# Altium PCB IO_PCB.PcbDoc
Units mm, origin at the board's own origin, x right, y up, seen from the top; angles counter-clockwise.
Board outline 52.58 x 21.21 mm, 2 copper layers (Top Layer, Bottom Layer); 30 components, 24 nets, 111 pads, 88 vias.
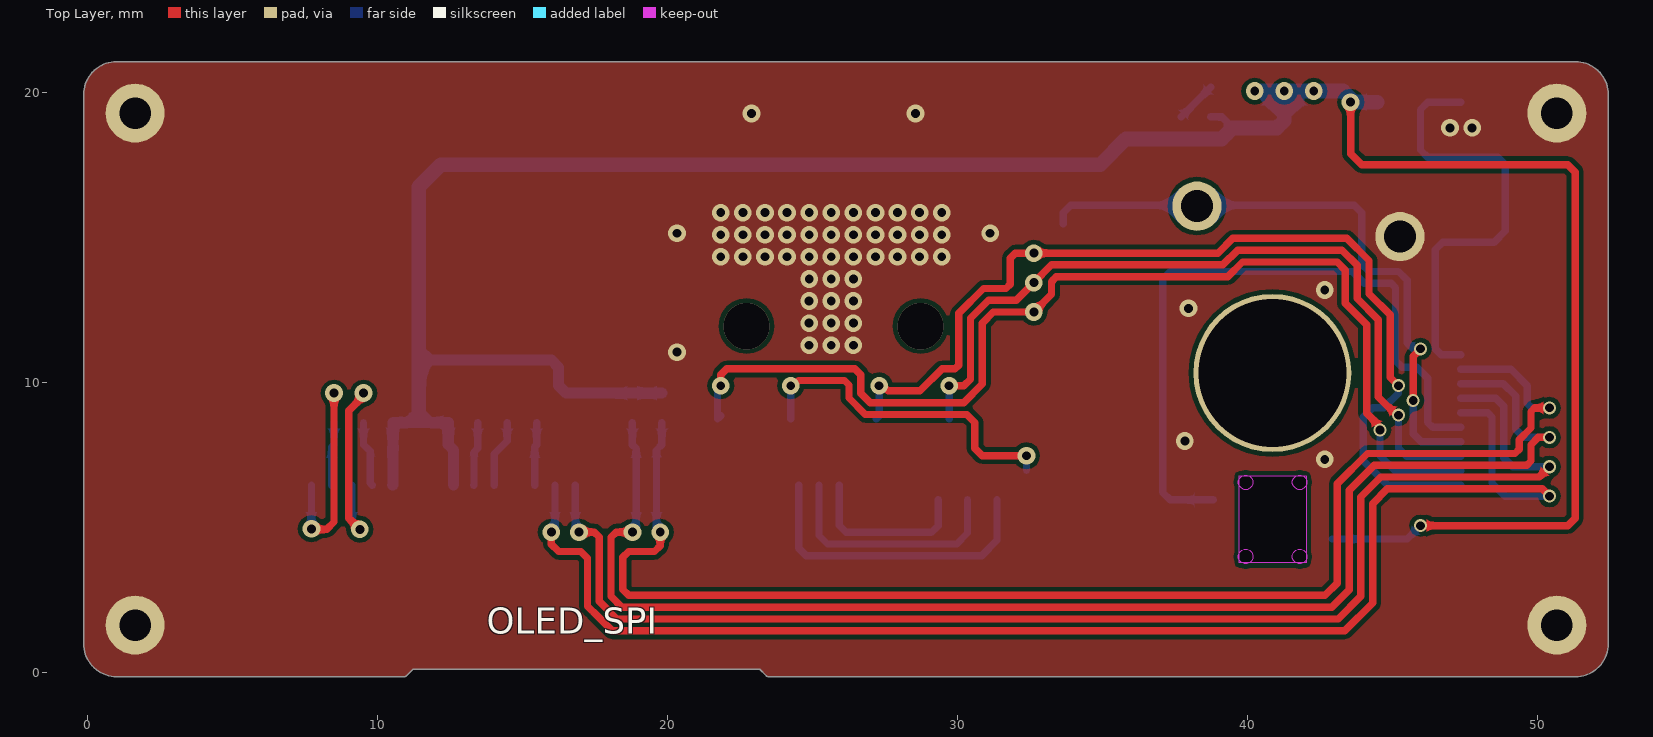
[diagram p0: Top Layer view]
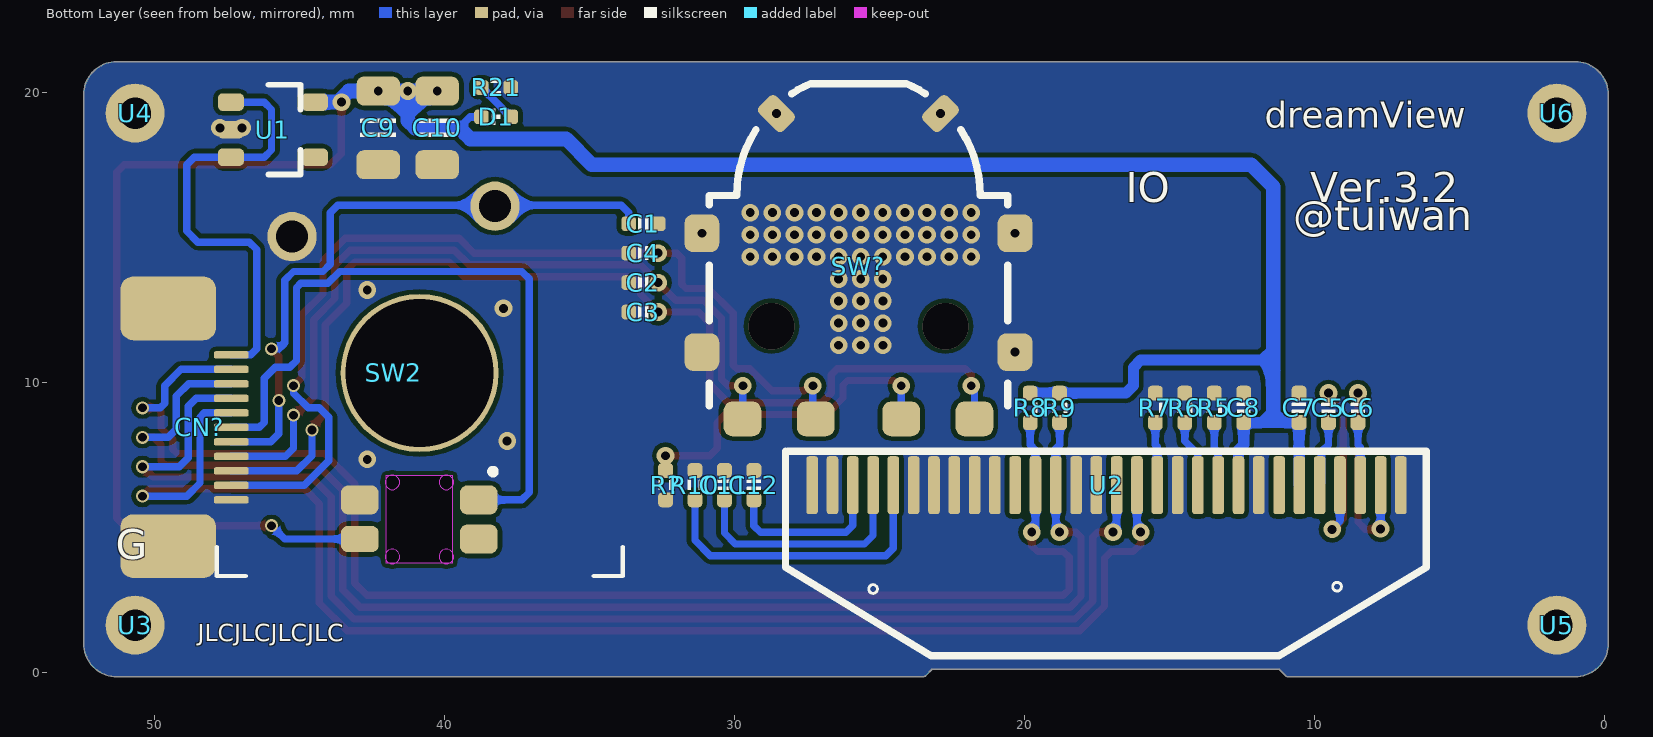
[diagram p1: Bottom Layer view, seen from below]
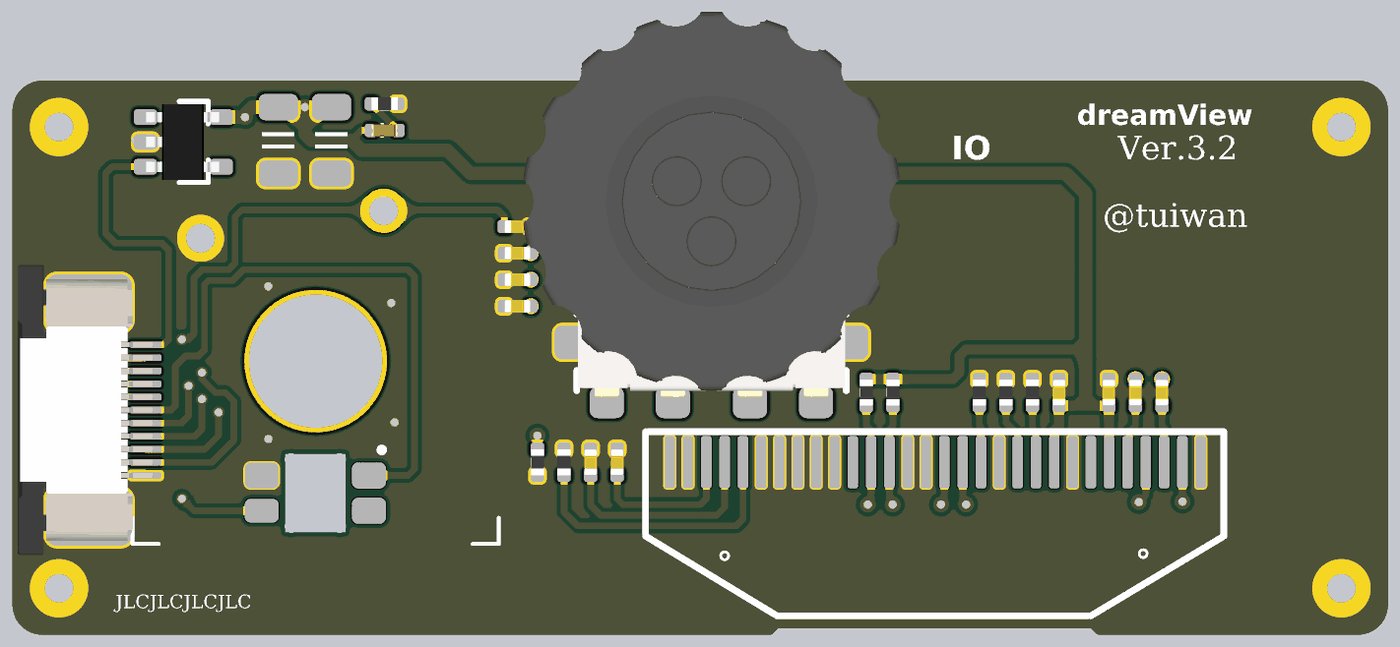
[diagram p2: 3D render of the assembled board from below, using the file's embedded part models]

## Layer stack, top to bottom
Top Solder: solder mask 0.0102, Solder Resist, Dk 3.5
Top Layer: signal copper 0.0356
Dielectric 1: dielectric 0.32, FR-4, Dk 4.8
Bottom Layer: signal copper 0.0356
Bottom Solder: solder mask 0.0102, Solder Resist, Dk 3.5

## Board outline
1.016,-0.127 10.922,-0.127 ccw(c10.922,0) 11.013,-0.09 11.012,-0.09 11.229,0.127 23.188,0.127 23.405,-0.09 23.404,-0.09 ccw(c23.495,0) 23.495,-0.127 30.226,-0.127 51.308,-0.127 ccw(c51.308,1.016) 52.451,1.016 52.451,19.939 ccw(c51.308,19.939) 51.308,21.082 1.016,21.082 ccw(c1.016,19.939) -0.127,19.939 -0.127,1.016 ccw(c1.016,1.016)

## Design rules (kind name [scope] priority, off if disabled: settings)
Clearance Clearance_1 [All] p1: gap=0.152 ignorepadtopadclearanceinfootprint=FALSE except(0: Arc-Hole Track-Hole SMDPad-Hole THPad-Hole Via-Hole Fill-Hole Poly-Hole Region-Hole Text-Hole)
Clearance [All] p2: gap=0.254 ignorepadtopadclearanceinfootprint=FALSE except(0: Arc-Hole Track-Hole SMDPad-Hole THPad-Hole Via-Hole Fill-Hole Poly-Hole Region-Hole Text-Hole)
ComponentClearance [All] p1: gap=0 collisioncheckmode=3 verticalgap=0 showdistances=FALSE
Length [InNetClass('spi')] p1: maxlimit=30.48 minlimit=29.718 usedelayunits=FALSE
MatchedLengths [InNetClass('spi')] p1: tolerance=25.4 checknetsindiffpair=FALSE checkdiffpairvsdiffpair=TRUE checkxsignals=TRUE checkothers=TRUE usedelayunits=FALSE
PlaneConnect [All] p1: planeconnectstyle=Direct reliefexpansion=0.508 reliefentries=4 reliefconductorwidth=0.254 reliefairgap=0.254
PolygonConnect [All] p1: connectstyle=Direct reliefconductorwidth=0.254 reliefentries=4 polygonreliefangle="90 Angle" airgapwidth=0.254
RoutingVias [All] p1: holewidth=0.711 width=1.27 viastyle="Through Hole" minholewidth=0.711 minwidth=1.27 maxholewidth=0.711 maxwidth=1.27
SolderMaskExpansion [All] p1: expansion=0.102
UnRoutedNet [All] p1: checkbadconnections=TRUE
Width [All] p1: maxlimit=2.032 minlimit=0.254 preferedwidth=0.254 minimp=50.000000 maximp=50.000000 favimp=50.000000
27 further rules are at their usual default settings.

## Components (designator, comment, footprint, x,y, rotation, side; value= is the part's Value field where it differs from the comment)
C1 "0.1uF" CAP_0402 33.147,15.494 r180 bottom
C2 "0.1uF" CAP_0402 33.147,13.462 r180 bottom
C3 "0.1uF" CAP_0402 33.147,12.446 r180 bottom
C4 "0.1uF" CAP_0402 33.147,14.478 r180 bottom
C5 "1uF" CAP_0402 9.525,9.144 r270 bottom
C6 "1uF" CAP_0402 8.509,9.144 r270 bottom
C7 "1uF" CAP_0402 10.541,9.144 r90 bottom
C8 "1uF" CAP_0402 12.446,9.144 r90 bottom
C9 "10uF" CAP_1206 42.291,18.796 r90 bottom
C10 "0.1uF" CAP_1206 40.259,18.796 r90 bottom
C11 "4.7uF" CAP_0402 30.353,6.477 r270 bottom
C12 "2.2uF" CAP_0402 29.337,6.477 r270 bottom
CN? "X1002WRS-11B1-9TSN" FPC-SMD_P0.50-11P_LCS-SJ-H2.0 48.446,8.473 r90 bottom
D1 "color?" LED_0402 38.227,19.177 r180 bottom
R5 "4.7K" RES_0402 13.462,9.144 r270 bottom value=22R
R6 "4.7K" RES_0402 14.478,9.144 r270 bottom value=22R
R7 "4.7K" RES_0402 15.494,9.144 r270 bottom value=22R
R8 "4.7K" RES_0402 19.812,9.144 r90 bottom value=22R
R9 "4.7K" RES_0402 18.796,9.144 r90 bottom value=22R
R10 "10K" RES_0402 31.369,6.477 r90 bottom value=22R
R21 "1K" RES_0402 38.227,20.193 r180 bottom value=22R
R? "10K" RES_0402 32.385,6.477 r270 bottom value=22R
SW2 "佳达隆带灯热插拔矮轴" Gateron_Switch_Direct 40.863,10.346 r0 top
SW? "MITSUMI拨轮编码器" SIQ_02FVS3 25.732,16.463 r180 bottom
U1 "SPX3819M5-L-3-3" SOT23_5 45.871,18.735 r180 bottom
U2 "SSD1306/15" OLED_0.96_30P 28.287,7.804 r180 bottom
U3 "螺柱孔" M1 50.673,1.651 r180 bottom
U4 "螺柱孔" M1 50.673,19.304 r180 bottom
U5 "螺柱孔" M1 1.651,1.651 r180 bottom
U6 "螺柱孔" M1 1.651,19.304 r180 bottom

## Footprints (in the part's own frame and the unit in brackets; to place one, negate y for a bottom-side part, rotate by r counter-clockwise, add the part's x,y. Pads: shape width x height; smd on the part's side, far side on the other; paste and mask are expansions set on the pad)
CAP_0402 [mil] "CAP_0402"
  rrect50% 20x20 smd: 1(-20,0) 2(20,0)
  silkscreen extent -6,-9 7,9, body extent -20,-10 20,10, height 20
CAP_1206 [mm] "CAP_1206"
  rrect50% 1x1.5 smd: 1(-1.27,0) 2(1.27,0)
  silkscreen extent -0.3,-0.61 0.3,0.61, body extent -1.5,-0.75 1.5,0.75, height 1.5
FPC-SMD_P0.50-11P_LCS-SJ-H2.0 [mm]
  rrect50% 0.25x1.2 smd: 1(2.498,-1.084) 2(1.998,-1.084) 3(1.498,-1.084) 4(0.998,-1.084) 5(0.498,-1.084) 6(-0.002,-1.084) 7(-0.502,-1.084) 8(-1.002,-1.084) 9(-1.502,-1.084) 10(-2.002,-1.084) 11(-2.502,-1.084)
  rrect40% 2.2x3.3 smd: 12(4.1,1.084) 13(-4.1,1.084)
  body extent -5.55,-1.39 5.55,3.81, height 2
Gateron_Switch_Direct [mm] "佳达隆焊接带灯矮轴"
  round 1.699 hole 1.1 mask+0.051: 1(-2.6,5.752) 2(4.4,4.702)
  round 5.45 hole 5.1 mask+0.102: NC(0,0)
  rrect50% 1.3x0.9 smd far side mask+0.051: RGB0(2.063,-5.727)
  rrect50% 1.3x1 smd far side mask+0.051: RGB1(-2.037,-5.727) RGB2(2.063,-4.377) RGB3(-2.037,-4.377)
  Keep-Out Layer board cut-out: 1.163,-6.552 -1.137,-6.552 -1.137,-3.552 1.163,-3.552 1.163,-6.552
  Keep-Out Layer board cut-out: -0.667,-3.772 -0.667,-3.822 -0.705,-3.914 -0.776,-3.984 -0.867,-4.022 -0.967,-4.022 -1.059,-3.984 -1.129,-3.914 -1.167,-3.822 -1.167,-3.772 -1.167,-3.722 -1.129,-3.631 -1.059,-3.56 -0.967,-3.522 -0.867,-3.522 -0.776,-3.56 -0.705,-3.631 -0.667,-3.722 -0.667,-3.772 -0.667,-3.772
  Keep-Out Layer board cut-out: 1.193,-3.772 1.193,-3.822 1.155,-3.914 1.084,-3.984 0.992,-4.022 0.893,-4.022 0.801,-3.984 0.731,-3.914 0.693,-3.822 0.693,-3.772 0.693,-3.722 0.731,-3.631 0.801,-3.56 0.893,-3.522 0.992,-3.522 1.084,-3.56 1.155,-3.631 1.193,-3.722 1.193,-3.772 1.193,-3.772
  Keep-Out Layer board cut-out: 1.193,-6.332 1.193,-6.382 1.155,-6.474 1.084,-6.544 0.992,-6.582 0.893,-6.582 0.801,-6.544 0.731,-6.474 0.693,-6.382 0.693,-6.332 0.693,-6.282 0.731,-6.19 0.801,-6.12 0.893,-6.082 0.992,-6.082 1.084,-6.12 1.155,-6.19 1.193,-6.282 1.193,-6.332 1.193,-6.332
  Keep-Out Layer board cut-out: -0.667,-6.332 -0.667,-6.382 -0.705,-6.474 -0.776,-6.544 -0.867,-6.582 -0.967,-6.582 -1.059,-6.544 -1.129,-6.474 -1.167,-6.382 -1.167,-6.332 -1.167,-6.282 -1.129,-6.19 -1.059,-6.12 -0.967,-6.082 -0.867,-6.082 -0.776,-6.12 -0.705,-6.19 -0.667,-6.282 -0.667,-6.332 -0.667,-6.332
LED_0402 [mil] "LED_0402"
  rrect50% 20x20 smd: 1(-20,0) 2(20,0)
  silkscreen extent -6,-10 6,10, body extent -20,-10 20,10, height 18
M1 [mil] "M1螺孔"
  round 80 hole 43 mask+4: 1(0,0)
OLED_0.96_30P [mm]
  rrect50% 0.4x2 smd mask+0.051: 1(21.258,-1.327) 2(20.558,-1.327) 3(19.858,-1.327) 4(19.158,-1.327) 5(18.458,-1.327) 6(17.758,-1.327) 7(17.058,-1.327) 8(16.358,-1.327) 9(15.658,-1.327) 10(14.958,-1.327) 11(14.258,-1.327) 12(13.558,-1.327) 13(12.858,-1.327) 14(12.158,-1.327) 15(11.458,-1.327) 16(10.758,-1.327) 17(10.058,-1.327) 18(9.358,-1.327) 19(8.658,-1.327) 20(7.958,-1.327) 21(7.258,-1.327) 22(6.558,-1.327) 23(5.858,-1.327) 24(5.158,-1.327) 25(4.458,-1.327) 26(3.758,-1.327) 27(3.058,-1.327) 28(2.358,-1.327) 29(1.658,-1.327) 30(0.958,-1.327)
  silkscreen extent 0.04,-7.21 22.14,-0.16
RES_0402 [mil] "RES_0402"
  rrect50% 20x20 smd: 1(-20,0) 2(20,0)
  silkscreen extent -6,-10 7,10, body extent -20,-10 20,10, height 14
SIQ_02FVS3 [mm] "美上美滚动编码器"
  rrect50% 1.3x1.2 smd: 1(-4,-7.7) 2(-1.475,-7.7) 3(1.475,-7.7) 4(4,-7.7)
  rrect50% 1.2x1.3 smd: 5(-5.4,-5.4) 5(-5.4,-1.3) 5(5.4,-5.4) 5(5.4,-1.3)
  rrect50% 0.85x1.2 smd rot 45: 5(-2.828,2.828)
  rrect50% 0.85x1.2 smd rot 135: 5(2.828,2.828)
  silkscreen extent -5.15,-7.25 5.15,3.86, body extent -7.2,-7.5 7.2,7.25, height 4.06
SOT23_5 [mm] "SOT23_5"
  rrect50% 0.889x0.6 smd: 1(-1.5,0.95) 2(-1.5,0) 3(-1.5,-0.95) 4(1.396,-0.95) 5(1.396,0.95)
  silkscreen extent -0.2,-1.55 0.9,1.55, body extent -1.48,-1.45 1.32,1.45, height 1.2

## Part data
C1 C2 C3 C4 C5 C6 C7 C8 C9 C10 C11 C12: library part Capacitor_MLCC, "Capacitor_MLCC"
CN?: library part 11P端子, Current Rating (Max)=1A, JLCPCB Part Class=扩展, LCSC Part Name="1mm 1x11P 卧贴 带", Manufacturer="XKB Connectivity(中国星", Operating Temperature Range=-25¡æ~+85¡, Welding Temperature (Max)=260℃, Add into BOM=yes, Contact Material=»ÆÍ, Contact Plating=锡, Convert to PCB=yes, Datasheet=https://atta.szlcsc.com/upload/public/pdf/source/20211011/1437E7AC5BA28D97E3BC6E2D0E99510D.pdf, Device=X1002WRS-11B1-9TSN, Gender=¹«ÐÍ², Manufacturer Part=X1002WRS-11B1-9TSN, Mounting Style=ÎÔÌ, Name=X1002WRS-11B1-9TSN, Number of PINs Per Row=11, Number of Rows=1, Pins Structure=1x11P, Pitch=1mm, Reference Series=-, Row Spacing=-, Supplier=LCSC, Supplier Footprint=SMD,P=1mm, Supplier Part=C528067, Symbol=X1002WRS-11B1-9TSN
D1: library part LED, "LED"
R5 R6 R7 R8 R9 R10 R21 R?: library part Resistor_SMD, "Resistor_SMD"
SW2: library part Gateron_Switch_Low, Add into BOM=yes, Convert to PCB=yes, Device=带灯热插, Symbol=带灯热插
SW?: library part MITSUMI_Encoder, "MITSUMI美上美拨轮编码器", BOM_JLCPCB Part Class="Extended Part", BOM_Manufacturer=ALPSALPINE, BOM_Manufacturer Part=EC11E1534443, BOM_Supplier=LCSC, BOM_Supplier Part=C1322543, Contributor=LCSC, spicePre=S, spiceSymbolName=EC11E1534443
U1: library part LP2992, "LP2992_LDO"
U2: library part SSD1306-12864, Add into BOM=yes, Convert to PCB=yes, Device=SSD1306/15, Symbol=SSD1306/15
U3 U4 U5 U6: library part Hole, _=3, Add into BOM=yes, Convert to PCB=yes, Device=M2螺柱, Symbol=M2螺柱

## Via types
v1: diameter 0.61, hole 0.305, Top Layer to Bottom Layer, tented both sides, 76 vias
v2: diameter 0.45, hole 0.3, Top Layer to Bottom Layer, tented both sides, 10 vias
v3: diameter 1.6, hole 1.6, Top Layer to Bottom Layer, 2 vias

## Nets (pads, with @x,y where several pads share a name; then routed paths per layer and width w, separated by ;. In a path a pad name is that pad's centre, name@x,y a point inside that pad or via, vN(x,y) a via of type N, cw(c..) or ccw(c..) an arc to the next point about the centre after c; other vN are vias at no path point)
3V3: C7.1 C8.1 C9.2 C10.2 D1.1 R8.2 R9.2 SW2.RGB0 U1.5 U2.6 U2.9 | length 97.1
  Top Layer w0.254: v1(43.561,19.685) 43.561,17.907 43.942,17.526 51.054,17.526 51.308,17.272 51.308,5.334 51.054,5.08 v2(45.974,5.08)
  Bottom Layer w0.254: 11.43,10.795 11.811,10.795 ; D1.1 39.116,19.177 39.306,18.986 ; 39.306,18.605 39.306,18.986 ; 39.497,18.796 39.306,18.986 ; SW2.RGB0 45.513,4.619 v2(45.974,5.08)
  Bottom Layer w0.381: U2.6 10.541,6.489 C7.1 11.049,8.636 ; 11.43,10.414 11.811,10.795 ; 11.43,11.176 11.811,10.795 ; U2.9 12.629,7.691 12.446,7.874 C8.1 11.811,8.636 ; R8.2 R9.2 16.51,9.652 16.256,9.906 16.256,10.541 16.002,10.795 11.811,10.795 ; 11.049,8.636 11.811,8.636 ; 11.049,8.636 11.239,8.826 ; 11.239,8.826 11.43,9.017 11.62,8.826 ; 11.239,8.826 11.62,8.826 ; 11.62,8.826 11.811,8.636
  Bottom Layer w0.508: 11.43,9.017 11.43,10.414 11.43,10.795 11.43,11.176 11.43,16.764 12.192,17.526 34.925,17.526 35.814,18.415 38.735,18.415 39.116,18.415 39.306,18.605 39.497,18.796 41.021,18.796 41.275,19.05 41.275,19.368 ; v1(40.259,20.066) C10.2@40.509,20.066 ; U1.5 43.688,19.685 43.307,20.066 v1(42.291,20.066) v1@41.529,20.066 ; C10.2@40.509,20.066 C10.2@40.894,20.066 ; C10.2@40.509,20.066 C10.2@40.782,19.793 ; C10.2@40.782,19.793 41.207,19.368 41.275,19.368 ; C10.2@40.782,19.793 v1@41.167,19.793 ; C10.2@40.894,20.066 v1@41.167,19.793 ; C10.2@40.894,20.066 v1(41.275,20.066) ; v1@41.167,19.793 41.275,19.685 ; 41.275,19.368 41.342,19.368 41.711,19.736 41.711,19.783 41.701,19.793 v1@41.383,19.793 ; 41.275,19.368 41.275,19.685 ; 41.275,19.685 v1@41.383,19.793 ; 41.275,19.685 v1(41.275,20.066) ; v1(41.275,20.066) v1@41.529,20.066 ; v1@41.383,19.793 41.529,19.939 v1@41.529,20.066
CS: R7.2 U2.13 | length 2.2
  Bottom Layer w0.254: U2.13 15.429,7.809 15.494,7.874 R7.2
D0: CN?.3 R9.1 U2.18 | length 48.5
  Top Layer w0.254: v1(18.802,4.858) 18.24,4.858 18.059,4.677 18.059,2.642 18.432,2.269 42.909,2.269 43.51,2.87 43.51,6.299 44.374,7.163 49.635,7.163 49.784,7.312 49.784,7.874 50.038,8.128 v2(50.419,8.128)
  Bottom Layer w0.254: R9.1 18.796,7.874 18.929,7.741 U2.18 18.929,4.985 v1(18.802,4.858) ; CN?.3 48.83,9.971 49.251,9.55 49.251,8.407 49.53,8.128 v2(50.419,8.128)
D1: CN?.2 R8.1 U2.19 | length 48.2
  Top Layer w0.254: v1(19.756,4.858) 19.756,4.389 19.558,4.191 18.669,4.191 18.466,3.988 18.466,2.878 18.669,2.675 42.68,2.675 43.104,3.099 43.104,6.528 44.145,7.569 49.229,7.569 49.378,7.718 49.378,8.042 49.784,8.449 49.784,9.017 49.911,9.144 v2(50.419,9.144)
  Bottom Layer w0.254: v1(19.756,4.858) 19.629,4.985 U2.19 19.629,7.691 19.812,7.874 R8.1 ; CN?.2 49.092,10.471 49.657,9.906 49.657,9.293 49.806,9.144 v2(50.419,9.144)
D/C: CN?.4 U2.15 | length 46.9
  Top Layer w0.254: v1(16.956,4.858) 17.486,4.858 17.653,4.691 17.653,2.473 18.264,1.862 43.137,1.862 43.917,2.642 43.917,6.071 44.602,6.756 50.063,6.756 v2(50.419,7.112)
  Bottom Layer w0.254: U2.15 16.829,4.985 v1(16.956,4.858) ; CN?.4 48.568,9.471 48.844,9.195 48.844,7.417 49.149,7.112 v2(50.419,7.112)
ENC1: C2.2 CN?.8 SW?.1 | length 27.8
  Top Layer w0.254: v1(29.718,9.906) 30.226,9.906 30.455,10.135 30.455,12.233 31.074,12.852 32.029,12.852 v1(32.639,13.462) 33.249,14.072 39.157,14.072 39.665,14.58 43.266,14.58 43.79,14.056 43.79,12.913 44.52,12.183 44.52,9.518 45.148,8.89 v2(45.212,8.89)
  Bottom Layer w0.254: v1(29.718,9.906) 29.725,9.899 29.725,8.77 SW?.1 ; v2(45.212,8.89) 45.212,7.747 45.488,7.471 CN?.8
ENC2: C3.2 CN?.9 SW?.4 | length 37.7
  Top Layer w0.254: v1(21.844,9.906) 21.844,10.287 22.047,10.49 26.467,10.49 26.67,10.287 26.67,9.652 27,9.322 30.217,9.322 30.861,9.966 30.861,12.065 31.242,12.446 v1(32.639,12.446) 33.249,13.056 33.249,13.453 33.25,13.454 33.25,13.468 33.262,13.48 33.262,13.491 33.277,13.505 33.277,13.514 33.293,13.531 33.293,13.537 33.312,13.556 33.312,13.559 33.333,13.58 ; 33.333,13.582 33.417,13.665 39.326,13.665 39.834,14.173 43.097,14.173 43.383,13.887 43.383,12.744 44.113,12.014 44.113,8.96 44.577,8.496 v2(44.577,8.382)
  Bottom Layer w0.254: SW?.4 21.732,9.794 v1(21.844,9.906) ; SW?.4@21.776,8.807 SW?.4@21.844,8.875 ; v2(44.577,8.382) 44.577,7.493 45.099,6.971 CN?.9
ENC3: C4.2 CN?.10 SW?.2 | length 34
  Top Layer w0.254: v1(27.305,9.906) 27.373,9.838 27.5,9.838 27.61,9.728 28.714,9.728 29.476,10.49 29.921,10.49 30.048,10.617 30.048,12.402 30.905,13.259 31.677,13.259 31.826,13.408 31.826,14.3 32.004,14.478 v1(32.639,14.478) 38.989,14.478 39.497,14.986 43.434,14.986 44.196,14.224 44.196,13.081 44.926,12.351 44.926,10.192 v2(45.212,9.906)
  Bottom Layer w0.254: SW?.2 27.305,8.861 v1(27.305,9.906) ; v2(45.212,9.906) 45.212,9.652 44.704,9.144 44.323,9.144 43.993,8.814 43.993,7.315 44.837,6.471 CN?.10
GND: C1.2 C2.1 C3.1 C4.1 C7.2 C8.2 C9.1 C10.1 C11.1 C12.1 CN?.11 CN?.12 CN?.13 R5.1 R6.1 R7.1 R10.2 R21.2 R?.2 SW2.2 SW2.RGB2 SW?.5 U1.2 U2.1 U2.8 U2.12 U2.16 U2.17 U2.21 U2.22 U2.23 U2.24 U2.25 U2.29 U2.30 U3.1 U4.1 U5.1 U6.1
  other v1: 42.672,7.366 37.846,8.001 20.332,11.063 24.892,11.303 25.654,11.303 26.416,11.303 24.892,12.065 25.654,12.065 26.416,12.065 37.973,12.573 24.892,12.827 25.654,12.827 26.416,12.827 42.672,13.208 24.892,13.589 25.654,13.589 26.416,13.589 21.844,14.351 22.606,14.351 23.368,14.351 24.13,14.351 24.892,14.351 25.654,14.351 26.416,14.351 27.178,14.351 27.94,14.351 28.702,14.351 29.464,14.351 21.844,15.113 22.606,15.113 23.368,15.113 24.13,15.113 24.892,15.113 25.654,15.113 26.416,15.113 27.178,15.113 27.94,15.113 28.702,15.113 29.464,15.113 20.332,15.163 31.132,15.163 21.844,15.875 22.606,15.875 23.368,15.875 24.13,15.875 24.892,15.875 25.654,15.875 26.416,15.875 27.178,15.875 27.94,15.875 28.702,15.875 29.464,15.875 46.99,18.796 47.752,18.796 22.904,19.291 28.56,19.291
KEY: C1.1 CN?.7 SW2.1 | length 22
  Top Layer w0.254: v2(45.72,9.398) 45.72,10.922 v2(45.974,11.176)
  Bottom Layer w0.254: C1.1 33.655,15.875 33.909,16.129 38.232,16.129 SW2.1 38.295,16.129 43.688,16.129 43.942,15.875 43.942,14.097 44.196,13.843 45.212,13.843 45.517,13.538 45.517,11.379 45.72,11.176 v2(45.974,11.176) ; v2(45.72,9.398) 45.72,8.255 46.004,7.971 CN?.7
NetC5_1: C5.1 U2.4 | length 6.7
  Top Layer w0.254: v1(9.398,4.953) 9.017,5.334 9.017,9.048 9.525,9.556 v1(9.525,9.652)
  Bottom Layer w0.254: U2.4 9.129,5.222 v1(9.398,4.953)
NetC5_2: C5.2 U2.5 | length 2.3
  Bottom Layer w0.254: C5.2 9.525,7.874 9.756,7.643 9.756,6.55 U2.5
NetC6_1: C6.1 U2.2 | length 6.8
  Top Layer w0.254: v1(7.729,4.971) 7.747,4.953 8.255,4.953 8.509,5.207 v1(8.509,9.652)
  Bottom Layer w0.254: v1(7.729,4.971) U2.2
NetC6_2: C6.2 U2.3 | length 2.2
  Bottom Layer w0.254: U2.3 8.429,7.794 8.509,7.874 C6.2
NetC11_2: C11.2 U2.27 | length 8.3
  Bottom Layer w0.254: U2.27 25.229,4.743 25.523,4.449 29.976,4.449 30.353,4.826 C11.2
NetC12_2: C12.2 U2.28 | length 5.9
  Bottom Layer w0.254: U2.28 25.929,5.088 26.162,4.855 29.112,4.855 29.337,5.08 C12.2
NetD1_2: D1.2 R21.1 | length 1.4
  Bottom Layer w0.254: D1.2 37.846,19.304 R21.1
NetR5_2: R5.2 U2.10 | length 2.2
  Bottom Layer w0.254: U2.10 13.335,6.483 13.335,7.62 13.462,7.747 R5.2
NetR6_2: R6.2 U2.11 | length 2.3
  Bottom Layer w0.254: U2.11 14.029,7.552 14.478,8.001 R6.2
NetR10_1: R10.1 U2.26 | length 10.7
  Bottom Layer w0.254: U2.26 24.529,4.3 24.787,4.042 30.839,4.042 31.369,4.572 R10.1
NetR?_1: R?.1 SW?.3 | length 11.7
  Top Layer w0.254: v1(24.257,9.906) 24.353,9.906 24.531,10.084 26.111,10.084 26.264,9.931 26.264,9.484 26.832,8.915 30.328,8.915 30.607,8.636 30.607,7.747 30.861,7.493 v1(32.385,7.493)
  Bottom Layer w0.254: SW?.3 v1(24.257,9.906) ; R?.1 v1(32.385,7.493)
RES: CN?.5 U2.14 | length 48.3
  Top Layer w0.254: v1(16.002,4.858) 16.002,4.445 16.256,4.191 17.018,4.191 17.247,3.962 17.247,2.305 17.396,2.156 ; 17.459,2.092 18.096,1.456 43.366,1.456 44.323,2.413 44.323,5.842 44.831,6.35 50.165,6.35 v2(50.419,6.096)
  Bottom Layer w0.254: v1(16.002,4.858) 16.129,4.985 U2.14 ; CN?.5 48.289,8.971 48.438,8.822 48.438,6.553 48.895,6.096 v2(50.419,6.096)
RGB: CN?.6 SW2.RGB3 | length 24.2
  Bottom Layer w0.254: SW2.RGB3 37.338,5.969 37.084,6.223 37.084,13.589 37.338,13.843 43.621,13.843 44.028,13.437 44.962,13.437 45.11,13.288 45.11,10.77 45.339,10.541 45.847,10.541 46.228,10.16 46.228,8.636 46.393,8.471 CN?.6
VCC: CN?.1 U1.1 U1.3 | length 15.4
  Bottom Layer w0.254: CN?.1 46.687,10.971 46.482,11.176 46.482,14.605 46.736,14.859 48.514,14.859 48.895,15.24 48.895,17.526 48.636,17.785 U1.3 47.366,17.78 46.228,17.78 45.974,18.034 45.974,19.431 46.228,19.685 U1.1
pads on no net: SW2.NC SW2.RGB1 U1.4 U2.7 U2.20
copper on no net:
  other v3: 22.732,11.963 28.732,11.963

## Polygon pours and split planes (outlines as drawn)
GND on Top Layer "Top Layer-GND" (solid, remove dead copper, pour order 12): 1.016,-0.127 10.922,-0.127 ccw(c10.922,0) 11.013,-0.09 11.012,-0.09 11.229,0.127 23.188,0.127 23.405,-0.09 23.404,-0.09 ccw(c23.495,0) 23.495,-0.127 30.226,-0.127 51.308,-0.127 ccw(c51.308,1.016) 52.451,1.016 52.451,19.939 ccw(c51.308,19.939) 51.308,21.082 1.016,21.082 ccw(c1.016,19.939) -0.127,19.939 -0.127,1.016 ccw(c1.016,1.016)
GND on Bottom Layer "Bottom Layer-GND" (solid, remove dead copper, pour order 14): 1.016,-0.127 10.922,-0.127 ccw(c10.922,0) 11.013,-0.09 11.012,-0.09 11.229,0.127 23.188,0.127 23.405,-0.09 23.404,-0.09 ccw(c23.495,0) 23.495,-0.127 30.226,-0.127 51.308,-0.127 ccw(c51.308,1.016) 52.451,1.016 52.451,19.939 ccw(c51.308,19.939) 51.308,21.082 1.016,21.082 ccw(c1.016,19.939) -0.127,19.939 -0.127,1.016 ccw(c1.016,1.016)

## Silkscreen, mask and mechanical layers (free items; w line width, h text height)
Top Overlay:
  text "OLED_SPI" at 13.779,1.059 h1.52
Bottom Overlay:
  text "dreamView" at 11.716,18.506 h1.52
  text "Ver.3.2" at 10.16,15.893 h1.78
  text "IO" at 16.51,15.893 h1.78
  text "@tuiwan" at 10.731,14.914 h1.78
  text "G" at 51.35,3.574 h1.78
  text "JLCJLCJLCJLC" at 48.514,0.889 h1.02
Mechanical 1:
  lines w0.254: 10.033,20.955 16.764,20.955 23.495,20.955 30.226,20.955 ; 10.922,20.955 1.016,20.955 ccw(c1.016,19.939) 0,19.939 0,1.016 ccw(c1.016,1.016) 1.016,0 10.922,0 11.176,0.254 17.907,0.254 23.241,0.254 23.495,0 30.226,0 51.308,0 ccw(c51.308,1.016) 52.324,1.016 52.324,19.939 ccw(c51.308,19.939) 51.308,20.955 30.099,20.955
Drill Drawing:
  text ".Legend" at 0.254,24.13 h1.52